# Altium PCB Разводка платы 436122_001.PcbDoc
Units mm, origin at the board's own origin, x right, y up, seen from the top; angles counter-clockwise.
Board outline 60 x 45 mm, 2 copper layers (Top Layer, Bottom Layer), stack 1.571 mm thick; 29 components, 14 nets, 72 pads, 2 vias.
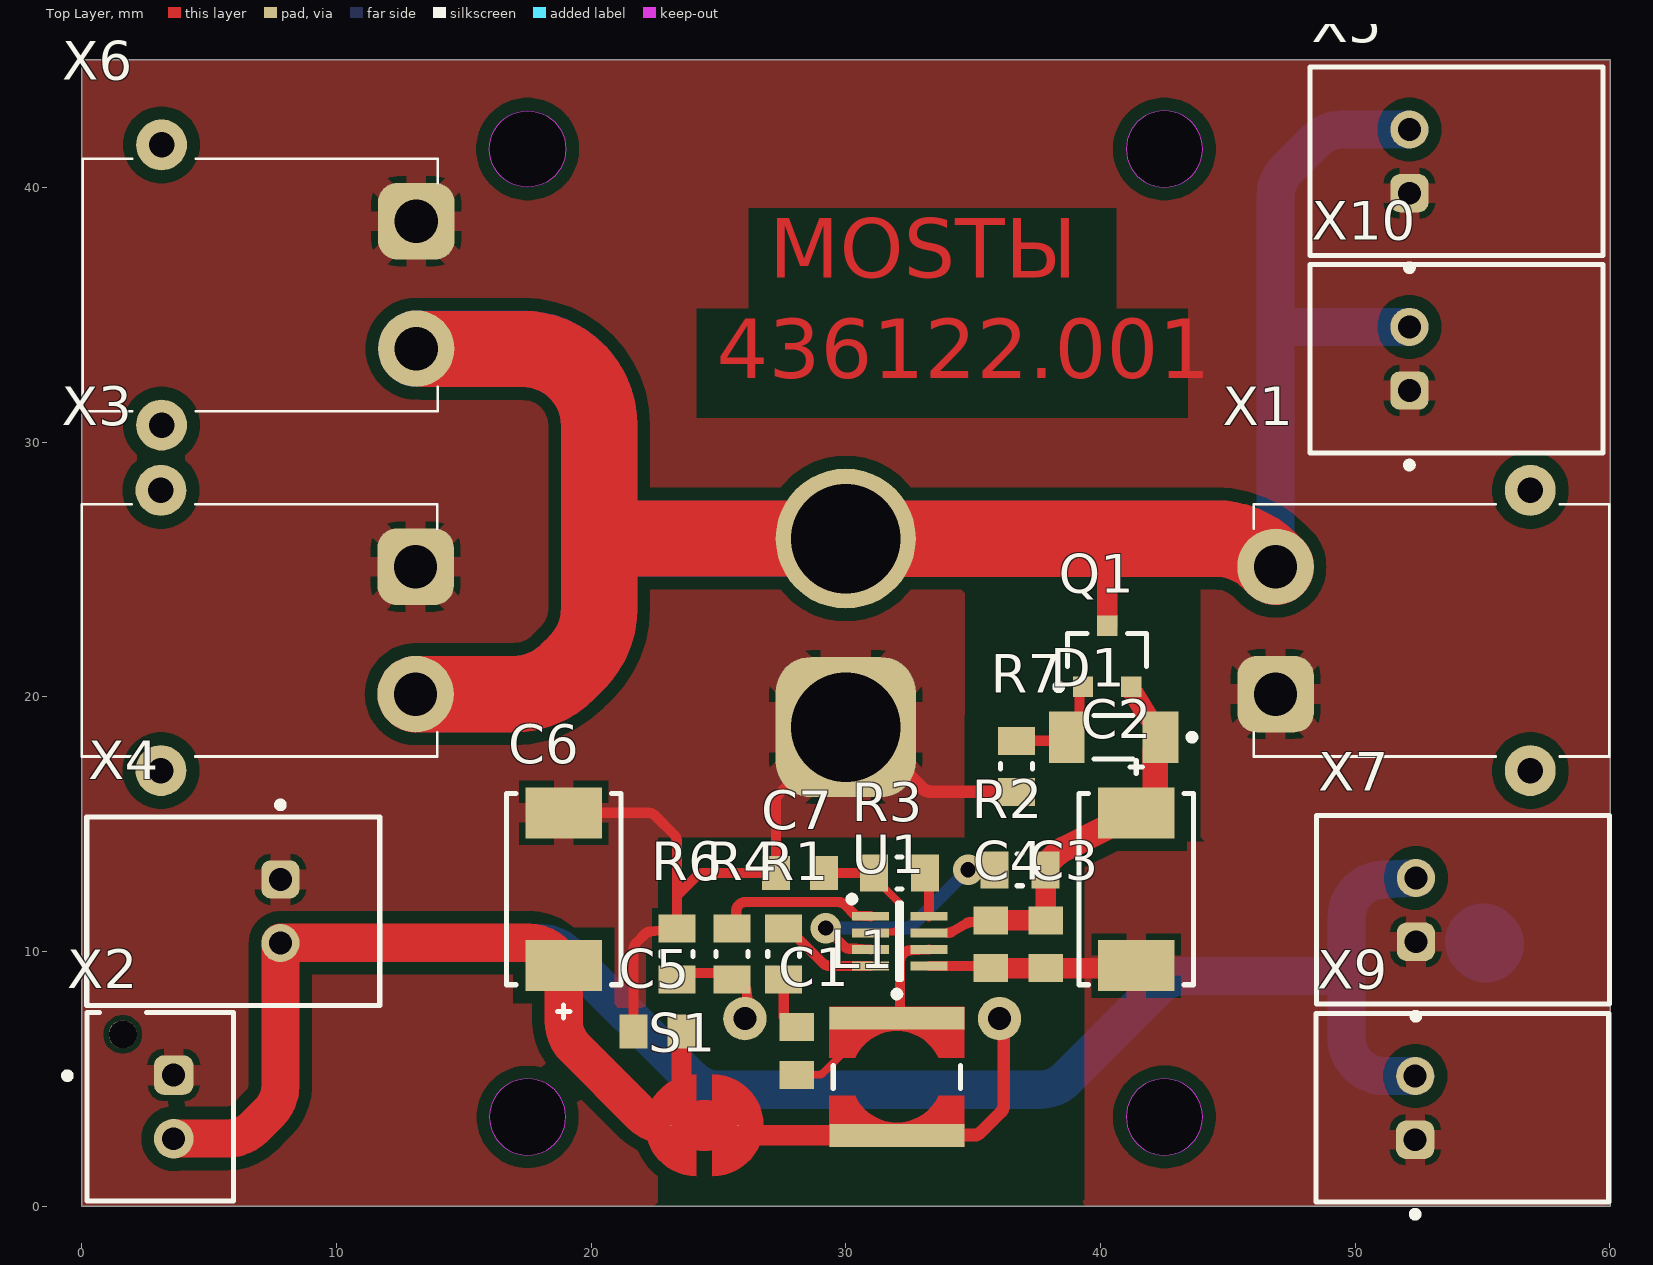
[diagram p0: Top Layer view]
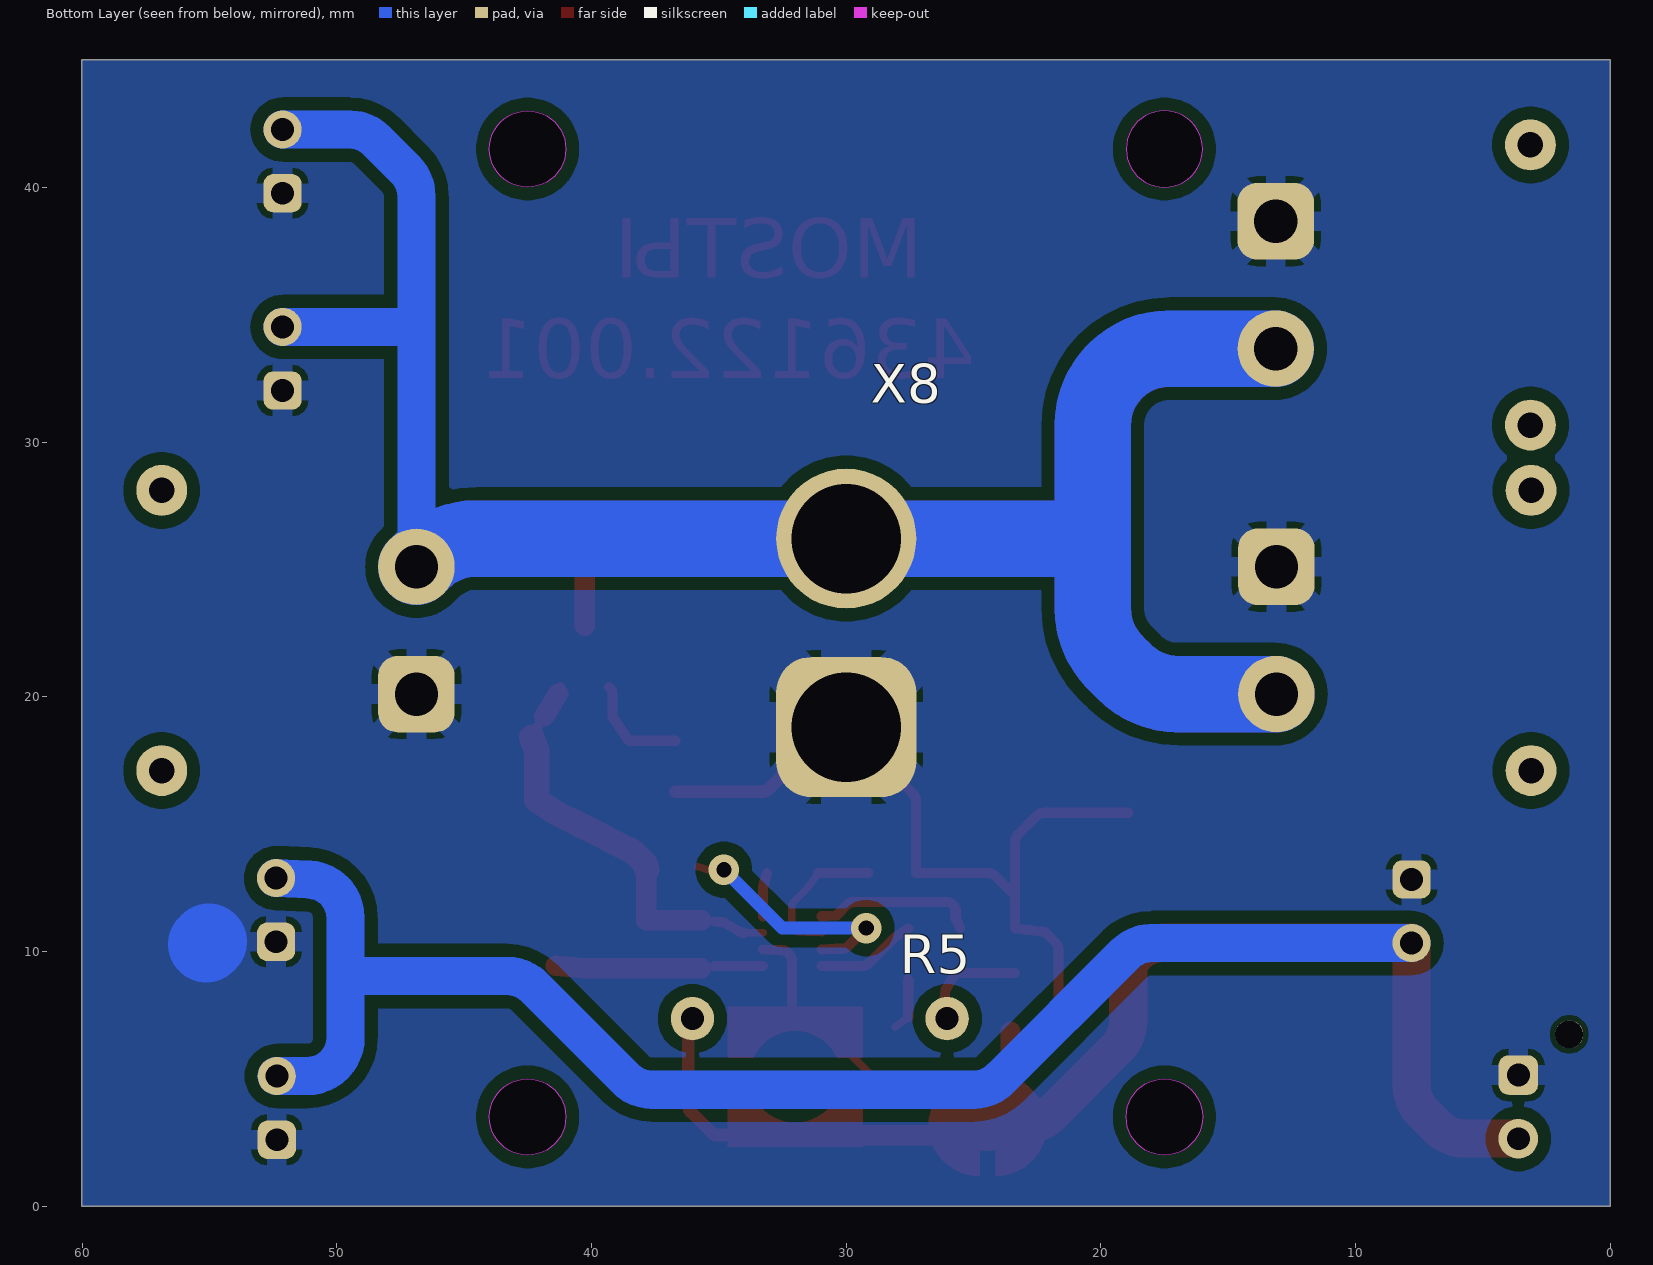
[diagram p1: Bottom Layer view, seen from below]
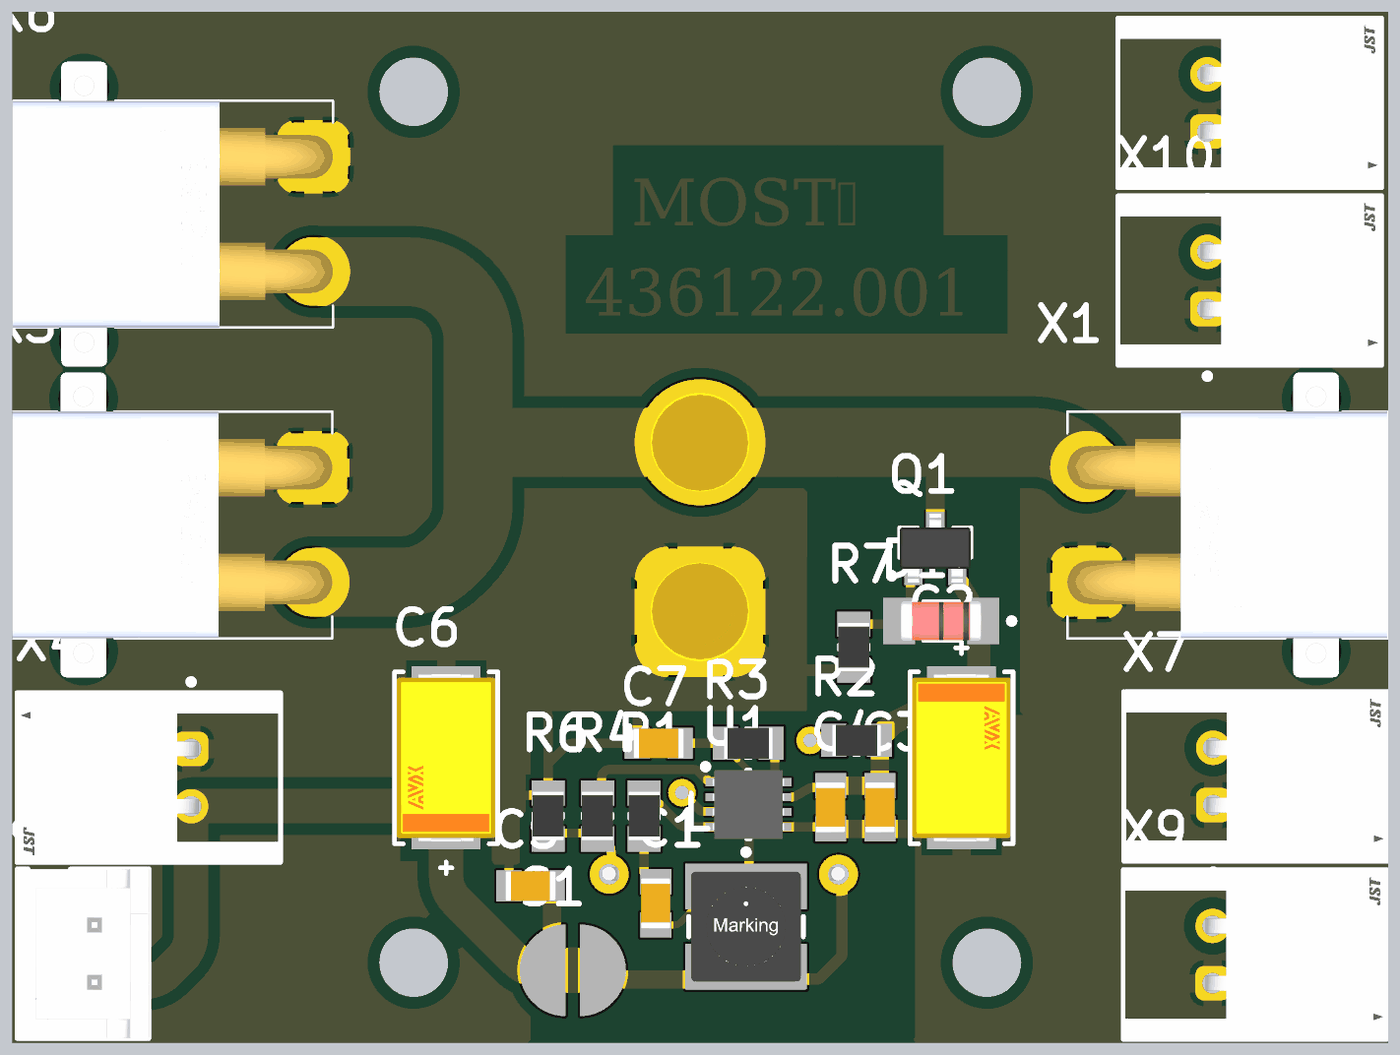
[diagram p2: 3D render of the assembled board from above, using the file's embedded part models]

## Layer stack, top to bottom
Top Layer: signal copper 0.0356
Dielectric 1: dielectric 1.5, FR-4, Dk 4.8
Bottom Layer: signal copper 0.0356

## Board outline
0.006,0.006 0.006,45.006 60.006,45.006 60.006,0.006
cut-out: 16.006,3.506 ccw(c17.506,3.506) 17.506,2.006 ccw(c17.506,3.506) 19.006,3.506 ccw(c17.506,3.506) 17.506,5.006 ccw(c17.506,3.506)
cut-out: 41.006,3.506 ccw(c42.506,3.506) 42.506,2.006 ccw(c42.506,3.506) 44.006,3.506 ccw(c42.506,3.506) 42.506,5.006 ccw(c42.506,3.506)
cut-out: 41.006,41.506 ccw(c42.506,41.506) 42.506,40.006 ccw(c42.506,41.506) 44.006,41.506 ccw(c42.506,41.506) 42.506,43.006 ccw(c42.506,41.506)
cut-out: 17.506,40.006 cw(c17.506,41.506) 16.006,41.506 cw(c17.506,41.506) 17.506,43.006 cw(c17.506,41.506) 19.006,41.506 cw(c17.506,41.506)

## Design rules (kind name [scope] priority, off if disabled: settings)
Clearance [All] p1: gap=0.2 ignorepadtopadclearanceinfootprint=FALSE except(0.5: Arc-Fill Arc-Poly Arc-Region Track-Fill Track-Poly Track-Region SMDPad-Fill SMDPad-Poly SMDPad-Region THPad-Fill THPad-Poly THPad-Region Via-Fill Via-Poly Via-Region Fill-Fill Fill-Poly Fill-Region Poly-Poly Poly-Region Region-Region; 0.8: Fill-Text Poly-Text Region-Text)
PolygonConnect [All] p1: thpad.connectstyle=Relief thpad.reliefconductorwidth=0.8 thpad.reliefentries=4 thpad.polygonreliefangle="90 Angle" thpad.airgapwidth=0.25 thpad.conductorbypadedge=TRUE thpad.mindistance=0.381 thpad.enablemindistance=FALSE smdpad.connectstyle=Relief smdpad.reliefconductorwidth=0.254 smdpad.reliefentries=4 smdpad.polygonreliefangle="90 Angle" smdpad.airgapwidth=0.254 via.connectstyle=Relief via.reliefconductorwidth=0.254 via.reliefentries=4 via.polygonreliefangle="90 Angle" via.airgapwidth=0.254
RoutingVias [All] p1: holewidth=0.711 width=1.27 viastyle="Through Hole" minholewidth=0.711 minwidth=1.27 maxholewidth=0.711 maxwidth=1.27
SolderMaskExpansion [All] p1: expansion=0.102 istentingtop=FALSE
SupplyNets "Schematic Supply Nets_3" [InNet('GND')] p1: voltage=0.000
SupplyNets "Schematic Supply Nets_2" [InNet('VCC')] p2: voltage=0.000
SupplyNets "Schematic Supply Nets_1" [InNet('+5')] p3: voltage=0.000
SupplyNets "Schematic Supply Nets" [InNet('VIN')] p4: voltage=0.000
Width [All] p1: maxlimit=10 minlimit=0.2 preferedwidth=0.3 toplayer_maxwidth=6 minimp=50.000000 maximp=50.000000 favimp=50.000000
30 further rules are at their usual default settings.

## Components (designator, comment, footprint, x,y, rotation, side; value= is the part's Value field where it differs from the comment)
C1 "10nF" CAPC2012X10N 28.067,6.096 r90 top
C2 "?uF" FP-TPSD-MFG 41.402,12.446 r90 top
C3 "100nF" CAPC2012X10N 37.846,10.287 r270 top
C4 "100nF" CAPC2012X10N 35.687,10.287 r270 top
C5 "100nF" CAPC2012X10N 22.606,6.858 r180 top
C6 "?uF" FP-TPSD-MFG 18.923,12.446 r270 top
C7 "100nF" CAPC2012X10N 28.194,13.081 r180 top
D1 "BZV55C9V1" FP-DO-213AA-MFG 40.513,18.415 r180 top
L1 "744043151" WE-TPC_4828 32.004,5.08 r0 top
Q1 "AO3401A" AO-SOT-23-3L_V 40.259,21.59 r90 top
R1 "20k" RES0805 27.559,9.906 r270 top
R2 "500k" RES0805 36.83,13.208 r180 top
R3 "100k" RES0805 32.106,13.081 r0 top
R4 "51k" RES0805 25.527,9.906 r270 top
R5 "41.2k" МЛТ-0.125 26.035,7.366 r0 bottom
R6 "7.5k" RES0805 23.368,9.906 r270 top
R7 "100k" RES0805 36.703,17.272 r90 top
S1 "" "Solder bridge" 24.765,3.175 r90 top
U1 "MP9943GQ-Z" "MP9943 QFN8" 30.363,12.059 r0 top
X1 "XT30" XT30PWM 52.783,22.606 r270 top
X2 "JST-2P" FP-B2B-XH-AM_LF_SN-MFG 3.087,3.9 r90 top locked
X3 "XT30" XT30PWM 7.197,22.606 r90 top
X4 "JST-2P" FP-S2B-XH-A-1_LF_SN-MFG 5.95,11.582 r90 top locked
X5 "JST-2P" FP-S2B-XH-A-1_LF_SN-MFG 53.975,41.021 r270 top
X6 "XT30" XT30PWM 7.222,36.17 r90 top
X7 "JST-2P" FP-S2B-XH-A-1_LF_SN-MFG 54.229,11.633 r270 top locked
X8 "XT60" XT60-perpendicular 29.997,18.813 r90 bottom locked
X9 "JST-2P" FP-S2B-XH-A-1_LF_SN-MFG 54.204,3.861 r270 top locked
X10 "JST-2P" FP-S2B-XH-A-1_LF_SN-MFG 53.975,33.274 r270 top

## Footprints (in the part's own frame and the unit in brackets; to place one, negate y for a bottom-side part, rotate by r counter-clockwise, add the part's x,y. Pads: shape width x height; smd on the part's side, far side on the other; paste and mask are expansions set on the pad)
AO-SOT-23-3L_V [mm] "SOT23, 3-Leads, Body 3.1x1.8mm, Pitch 0.95mm"
  rect 0.8x0.8 smd: 1(-1.2,0.95) 2(-1.2,-0.95) 3(1.2,0)
  silkscreen extent -1.32,-1.55 0.9,2.02, body extent -1.5,-1.55 1.5,1.55, height 1.25
CAPC2012X10N [mm] "Chip Capacitor, 2-Leads, Body 2,05x1,20mm, IPC Medium Density"
  rect 1.1x1.35 smd: 1(-0.94,0) 2(0.94,0)
  body extent -1.1,-0.65 1.1,0.65, height 1
FP-B2B-XH-AM_LF_SN-MFG [mm]
  rrect50% 1.55x1.55 hole 0.9 paste-2539.97 mask+0: 1(1.25,-0.525)
  round 1.55 hole 0.9 paste-2539.97 mask+0: 2(-1.25,-0.525)
  round 1.1 hole 1.1 unplated paste-2539.97 mask+0: ""(2.85,1.475)
  silkscreen extent -3.7,-2.88 3.7,3.77, body extent -3.8,-2.98 3.8,2.98, height 0.25
FP-DO-213AA-MFG [mm]
  rect 1.4x2.03 smd paste+0 mask+0: 1(-1.84,0) 2(1.84,0)
  silkscreen extent -3.2,-0.85 0.76,0.85, body extent -2.64,-1.11 2.64,1.11, height 0.25
FP-S2B-XH-A-1_LF_SN-MFG [mm]
  rrect50% 1.5x1.5 hole 0.9 paste-2539.97 mask+0: 1(1.25,-1.85)
  round 1.5 hole 0.9 paste-2539.97 mask+0: 2(-1.25,-1.85)
  silkscreen extent -3.7,-5.75 4.3,5.75, body extent -3.8,-5.85 3.8,5.85, height 0.25
FP-TPSD-MFG [mm]
  rect 2x3 smd paste+0 mask+0: 1(-3,0) 2(3,0)
  silkscreen extent -3.75,-2.25 5.05,2.25, body extent -4.1,-2.35 4.1,2.35, height 0.25
"MP9943 QFN8" [mm]
  rect 1.45x0.35 smd: 1(0.6,-0.675) 2(0.6,-1.325) 3(0.6,-1.975) 4(0.6,-2.625) 5(2.9,-2.625) 6(2.9,-1.975) 7(2.9,-1.325) 8(2.9,-0.675)
  silkscreen extent -0.25,-3.15 1.83,0.12, body extent 0.2,-3.15 3.3,-0.15, height 1
RES0805 [mm] "Chip Resistor, 2-Leads, Body 2.1x1.35mm, IPC Low Density"
  rect 1.1x1.45 smd: 1(-1,0) 2(1,0)
  silkscreen extent -0.1,-0.63 0.1,0.63, body extent -1.05,-0.68 1.05,0.67, height 0.6
"Solder bridge" [mil]
  round 1 smd: 1(0,-39.37) 2(0,64.37)
  Top Layer region: -78.74,25 78.74,25 70.94,59.16 49.09,86.56 17.52,101.77 -17.52,101.77 -49.09,86.56 -70.94,59.16 -78.74,25
  Top Layer region: -78.74,0 78.74,0 70.94,-34.16 49.09,-61.56 17.52,-76.77 -17.52,-76.77 -49.09,-61.56 -70.94,-34.16 -78.74,0
  Top Layer lines w78.74: 0,15 0,10
WE-TPC_4828 [mm] "Power Inductor, SMD, 2-Leads, body 4.8x4.8mm"
  rect 5.3x0.9 smd paste-403.566 mask-403.566: 1(0,2.3) 2(0,-2.3)
  Top Layer region: 2.65,-0.75 1.636,-0.75 1.636,-0.75 1.138,-1.394 0.407,-1.753 -0.407,-1.753 -1.138,-1.394 -1.636,-0.75 -1.636,-0.75 -2.65,-0.75 -2.65,-0.75 -2.65,-2.75 2.65,-2.75
  Top Layer region: -2.65,0.75 -1.636,0.75 -1.636,0.75 -1.138,1.394 -0.407,1.753 0.407,1.753 1.138,1.394 1.636,0.75 1.636,0.75 2.65,0.75 2.65,0.75 2.65,2.75 -2.65,2.75
  silkscreen extent -2.5,-0.45 2.5,3.37, body extent -2.4,-2.4 2.4,2.4, height 2.8
XT30PWM [mm]
  rrect50% 3x3 hole 1.7: 1(2.5,-5.912)
  round 3 hole 1.7: 2(-2.5,-5.912)
  round 2 hole 1: 3(5.5,4.088) 4(-5.5,4.088)
  silkscreen extent -4.95,-6.76 4.95,7.19, body extent -6.65,-6.76 6.65,7.19, height 5.06
XT60-perpendicular [mm]
  rrect50% 5.5x5.5 hole 4.3: 1(0,0)
  round 5.5 hole 4.3: 2(7.4,0)
  body extent -4.57,-3.75 11.98,3.75, height 16
МЛТ-0.125 [mm]
  round 1.7 hole 0.9: 1(0,0) 2(10,0)
  body extent -0.31,-1.02 10.29,0.97, height 2.5

## Part data
C1 C3 C4 C5 C7: library part "Конденсатор керамика", ClassName=DCDC
C2 C6: library part "Конденсатор танталовый", "Capacitor Polarised", Arrow Part Number=293D475X9010A2TE3, Manufacturer_Name=Vishay, Mouser Part Number=74-293D475X9010A2TE3, Arrow Price/Stock=https://www.arrow.com/en/products/293d475x9010a2te3/vishay, ClassName=DCDC, Datasheet Link=http://www.vishay.com/docs/40002/293d.pdf, Height=1.8mm, Manufacturer_Part_Number=293D475X9010A2TE3, Mouser Price/Stock=https://www.mouser.co.uk/ProductDetail/Vishay-Sprague/293D475X9010A2TE3?qs=zj6zwI%252Bv92RDYyeabgx%252B6w%3D%3D
D1: library part CMP-06360-000028-1, "DIODE ZENER 9.1V DO213AA"
L1: library part CMP-0227-00331-3, Ambient Temperature Range High=95°C, Ambient Temperature Range Low=-40°C, Case Code (Imperial)=1919, Case Code (Metric)=4848, Current Rating=420mA, DC Resistance (DCR)=770mΩ, Inductance=150µH, Inductance Tolerance=30%, Max Operating Temperature=125°C, Saturation Current=220mA, Self Resonant Frequency=7MHz, Test Frequency=100kHz, Case/Package=1919, Composition=Wirewound, Core Material=Ferrite, Height=2.8mm, Height - Seated (Max)=2.9972mm, Length=4.8mm, Max DC Current=420mA, Min Operating Temperature=-40°C, Mount="Surface Mount", NexarPartId=22866852, Number of Pins=2, Packaging="Tape & Reel (TR)", REACH SVHC=Unknown, RMS Current (Irms)=420mA, RoHS=Compliant, Shielding=Shielded, Termination=SMD/SMT, Tolerance=30%, Width=4.8mm
Q1: library part CMP-2000-05778-1, "P-Channel MOSFET, 30 V, 4 A, -55 to 150 degC, 3-Pin SOT-23-3L, RoHS, Tape and Reel", Continuous Drain Current=4A, Drain-Source On-Volt=30V, Frequency (Max)=NotRequiredMHz, Gate-Source Voltage (Max)=?12V, Manufacturer="Alpha and Omega", Operating Temp Range=-55Cto150C, Operating Temperature Classification=Military, Output Power (Max)=NotRequiredW, Package Description="3-Pin Small Outline Transistor, Body 2.95 x 1.6 mm, Pitch 0.95 mm", Package Reference=SOT-23-3L, Package Type=SOT-23, Power Dissipation=1.4W, Power Gain=NotRequireddB, Channel Mode=Enhancement, Datasheet URL=http://www.aosmd.com/res/data_sheets/AO3401A.pdf, Datasheet Version="Rev. 3, 03/2011", Drain Current (Max)=4A, Drain Efficiency=NotRequired%, Drain-Source On-Res=0.044ohm, Manufacturer URL=http://www.aosmd.com/, Mounting=SurfaceMount, Mounting Technology=SurfaceMount, Noise Figure=NotRequireddB, Number of  Elements=1, Package URL=http://www.aosmd.com/res/packaging_information/SOT-23-3L.pdf, Pin Count=3, Polarity=P, Rad Hardened=No, Type=PowerMOSFET
R1 R2 R3 R4 R6 R7: library part "Резистор SMD", "SMD resistors with differents footprints", ClassName=BootLogic
R5: library part МЛТ-0.125, ClassName=DCDC
S1: library part "Запаиваемая перемычка", "Нормально замкнута"
U1: "High Efficiency 3A Peak, 36V, / Synchronous Step Down Converter / With Power Good", ClassName=DCDC
X1 X3 X6: "XT30-PWM", Net1=GND, Net2=+5V, Net3=RX, Net4=TX
X2 X4 X5 X7 X9 X10: "JST type connector", Net1=GND
  X2 X4 X7 X9: Net2=+5V
  X5 X10: Net2=VCC
X8: "XT60 perpendicular connector", Net1=GND, Net2=+5V, Net3=RX, Net4=TX

## Via types
v1: diameter 1.2, hole 0.6, Top Layer to Bottom Layer, 2 vias

## Nets (pads, with @x,y where several pads share a name; then routed paths per layer and width w, separated by ;. In a path a pad name is that pad's centre, name@x,y a point inside that pad or via, vN(x,y) a via of type N, cw(c..) or ccw(c..) an arc to the next point about the centre after c; other vN are vias at no path point)
+5: C5.1 C6.2 S1.2 X2.2 X4.2 X7.2 X9.2 | length 92.2
  Top Layer w0.8: S1.2 23.312,3.357 ccw(c22.746,3.922) 23.546,3.922 C5.1
  Top Layer w1.5: X2.2 cw(c3.781,1.16) 3.781,2.66 5.721,2.66 ccw(c5.721,4.16) 6.781,3.098 7.361,3.678 ccw(c6.3,4.738) 7.8,4.738 X4.2 ; X4.2@7.809,10.341 17.546,10.341 cw(c17.546,8.841) 18.673,9.831 18.791,9.696 C6.2 18.923,7.273 ccw(c20.423,7.273) 19.361,6.213 21.961,3.613 ccw(c23.021,4.675) 23.021,3.175 S1.2
  Bottom Layer w1.5: X4.2 18.002,10.332 cw(c18.002,8.832) 19.063,9.893 23.946,5.01 ccw(c25.005,6.072) 25.005,4.572 37.606,4.572 ccw(c37.606,6.072) 38.666,5.011 42.258,8.603 cw(c43.318,7.541) 43.318,9.041 49.657,9.041 ; X9.2 51.157,5.111 cw(c51.157,6.611) 49.657,6.611 49.657,9.041 ; X7.2 51.088,12.825 ccw(c51.157,11.327) 49.657,11.327 49.657,9.041
GND: C2.1 C3.2 C4.2 C5.2 C6.1 C7.2 R6.1 R7.1 U1.5 X1.1 X2.1 X3.1 X4.1 X5.1 X6.1 X7.1 X8.1 X9.1 X10.1 | length 40.7
  Top Layer w0.3: C4.2@35.162,9.434 C4.2
  Top Layer w0.4: C6.1 20.223,15.446 22.234,15.446 cw(c22.234,15.046) 22.517,15.329 23.251,14.595 cw(c22.968,14.312) 23.368,14.312 23.368,12.192 ; C5.2 21.666,10.071 cw(c22.066,10.071) 21.783,10.353 22.108,10.678 cw(c22.39,10.394) 22.345,10.792 22.843,10.847 R6.1 23.368,12.192 ; X8.1 27.371,16.186 ccw(c27.654,15.904) 27.254,15.904 C7.2 24.423,13.081 ccw(c24.423,12.681) 24.14,12.964 23.368,12.192 ; U1.5 C4.2@35.162,9.434
  Top Layer w0.5: X8.1 31.372,18.047 33.002,16.418 ccw(c33.354,16.772) 33.354,16.272 R7.1
  Top Layer w0.8: C4.2 40.302,9.347 C2.1
  Bottom Layer w3: 55.022,10.383 55.118,10.287
NetC1_1: C1.1 L1.1 U1.6 | length 6.1
  Top Layer w0.3: C1.1 28.908,5.156 ccw(c28.908,5.456) 29.119,5.243 30.099,6.223
  Top Layer w0.4: L1.1@32.131,7.38 32.131,9.622 cw(c32.531,9.622) 32.249,9.905 32.281,9.937 cw(c32.562,9.653) 32.545,10.053 U1.6
NetC1_2: C1.2 R1.2 | length 2.1
  Top Layer w0.3: C1.2@27.559,7.436 C1.2
  Top Layer w0.4: C1.2@27.559,7.436 R1.2
NetC7_1: C7.1 R3.1 U1.2 | length 5.7
  Top Layer w0.3: U1.2 31.538,10.759 31.844,10.772 ccw(c31.831,11.072) 32.131,11.072 32.131,11.756 ccw(c31.831,11.756) 32.043,11.968 31.506,12.506 R3.1
  Top Layer w0.4: C7.1 R3.1
NetD1_2: D1.2 Q1.1 R7.2 | length 4.2
  Top Layer w0.4: R7.2 38.53,18.272 39.173,19.23 39.173,20.19 Q1.1
NetL1_2: L1.2 R5.2 S1.1 | length 14.1
  Top Layer w0.3: 35.131,2.794 35.198,2.83
  Top Layer w0.5: L1.2@32.145,2.794 35.131,2.794 ; 35.198,2.83 ccw(c35.055,3.094) 35.266,2.881 36.108,3.723 ccw(c35.895,3.934) 36.195,3.934 R5.2@36.195,7.359
  Top Layer w0.8: 26.116,3.221 26.557,2.78 L1.2
NetR1_1: R1.1 U1.4 | length 4
  Top Layer w0.4: R1.1 28.084,10.556 29.09,9.55 ccw(c29.372,9.834) 29.372,9.434 U1.4
NetR2_2: R2.2 U1.3 | length 9.7
  Top Layer w0.3: v1(34.798,13.208) 35.43,13.208 R2.2@35.83,13.335
  Top Layer w0.4: v1(29.21,10.922) 29.936,10.196 ccw(c30.147,10.409) 30.147,10.109 30.388,10.109 U1.3
  Bottom Layer w0.5: v1(29.21,10.922) 32.512,10.922 v1(34.798,13.208)
NetR3_2: R3.2 U1.8 | length 1.7
  Top Layer w0.4: R3.2 33.263,12.506 U1.8
NetR4_1: R4.1 U1.1 | length 6.4
  Top Layer w0.4: R4.1 25.7,11.306 25.7,11.606 cw(c26,11.606) 25.787,11.817 25.821,11.851 cw(c26.032,11.638) 26.032,11.938 29.734,11.938 cw(c29.734,11.638) 29.946,11.85 30.388,11.409 U1.1
NetR4_2: R4.2 R5.1 R6.2 | length 4
  Top Layer w0.4: R6.2@23.368,9.16 25.702,9.16 26.102,8.506 R5.1@26.195,7.62
VCC: Q1.3 X1.2 X3.2 X5.2 X6.2 X8.2 X10.2 | length 133.6
  Top Layer w0.8: Q1.3 40.259,26.213
  Top Layer w3: X3.2 16.958,20.106 ccw(c16.958,23.106) 19.078,20.983 19.443,21.348 ccw(c17.32,23.468) 20.32,23.468 20.32,26.215 ; X6.2@13.521,33.655 17.32,33.655 cw(c17.32,30.655) 20.32,30.655 20.32,26.215 ; X8.2@29.996,26.215 20.32,26.215 ; X8.2 40.259,26.213 44.521,26.213 cw(c44.521,23.213) 46.642,25.334 X1.2
  Bottom Layer w1.5: X1.2 46.871,39.645 cw(c48.371,39.645) 47.309,40.705 48.437,41.833 cw(c49.496,40.771) 49.496,42.271 X5.2 ; 46.871,34.544 ccw(c47.115,36.024) 47.115,34.524 X10.2
  Bottom Layer w3: X3.2 16.958,20.106 ccw(c16.958,23.106) 19.078,20.983 19.443,21.348 ccw(c17.32,23.468) 20.32,23.468 20.32,30.67 ccw(c17.32,30.67) 17.32,33.67 X6.2 ; 20.32,26.543 ccw(c21.688,29.213) 21.688,26.213 X8.2 44.521,26.213 cw(c44.521,23.213) 46.642,25.334 X1.2
VIN: C2.2 C3.1 C4.1 D1.1 Q1.2 R2.1 U1.7 | length 16.7
  Top Layer w0.3: U1.7 34.016,10.734 ; C4.1@35.162,11.176 C4.1
  Top Layer w0.4: 34.016,10.734 ccw(c34.016,11.034) 34.166,10.774 34.745,11.108 cw(c34.895,10.849) 34.865,11.147 C4.1@35.162,11.176 ; Q1.2 41.272,20.19 ccw(c41.646,20.332) Q1.2@41.305,20.124 ; D1.1@41.853,19.23 D1.1
  Top Layer w0.8: C4.1 C3.1 R2.1@37.846,13.208 ; Q1.2@41.305,20.124 D1.1@41.853,19.23
  Top Layer w1: R2.1 37.88,13.433 38.27,13.823 cw(c38.976,13.115) 38.529,14.01 40.402,14.946 C2.2 42.153,15.946 42.153,17.9 D1.1
pads on no net: X1.3 X1.4 X2. X3.3 X3.4 X6.3 X6.4

## Polygon pours and split planes (outlines as drawn)
GND on Bottom Layer "GND_L02_P001" (solid, pour order 1): 0.01,0.006 0.01,45.003 0.006,45.006 60.006,45.006 60.006,0.006
GND on Top Layer "GND_L01_P002" (solid, remove dead copper, pour order 2): 0.006,0.01 0.006,45.006 60.006,45.006 60.006,0.006

## Other copper
Top Layer:
  pour cut-out: 22.606,14.478 22.606,0 39.116,0 39.37,0.254 39.37,14.478
  pour cut-out: 43.942,24.257 43.942,14.478 44.112,14.308 34.653,14.308 34.671,24.257
  text "MOSTЫ" at 26.992,35.687 h4
  text "436122.001" at 24.938,31.75 h4

## Silkscreen, mask and mechanical layers (free items; w line width, h text height)
Mechanical 1:
  circle w0.013: c17.506,41.506 r1.5
  circle w0.013: c17.506,3.506 r1.5
  circle w0.013: c42.506,3.506 r1.5
  circle w0.013: c42.506,41.506 r1.5
  circle w0.006: c17.506,22.506 r0.003
  circle w0.006: c30.006,41.506 r0.003
  circle w0.006: c0.006,0.006 r0.003
  lines w0.013: 0.006,22.506 26.006,22.506 ; 30.006,31.006 30.006,45.006 ; 0.006,0.006 0.006,45.006 60.006,45.006 60.006,0.006 0.006,0.006 ; 17.506,3.506 17.506,41.506 42.506,41.506 42.506,3.506 17.506,3.506 ; 26.006,14.006 26.006,31.006 34.006,31.006 34.006,14.006 26.006,14.006